# EAGLE board SuperGreatPI_v03 (EAGLE 9.0.1)
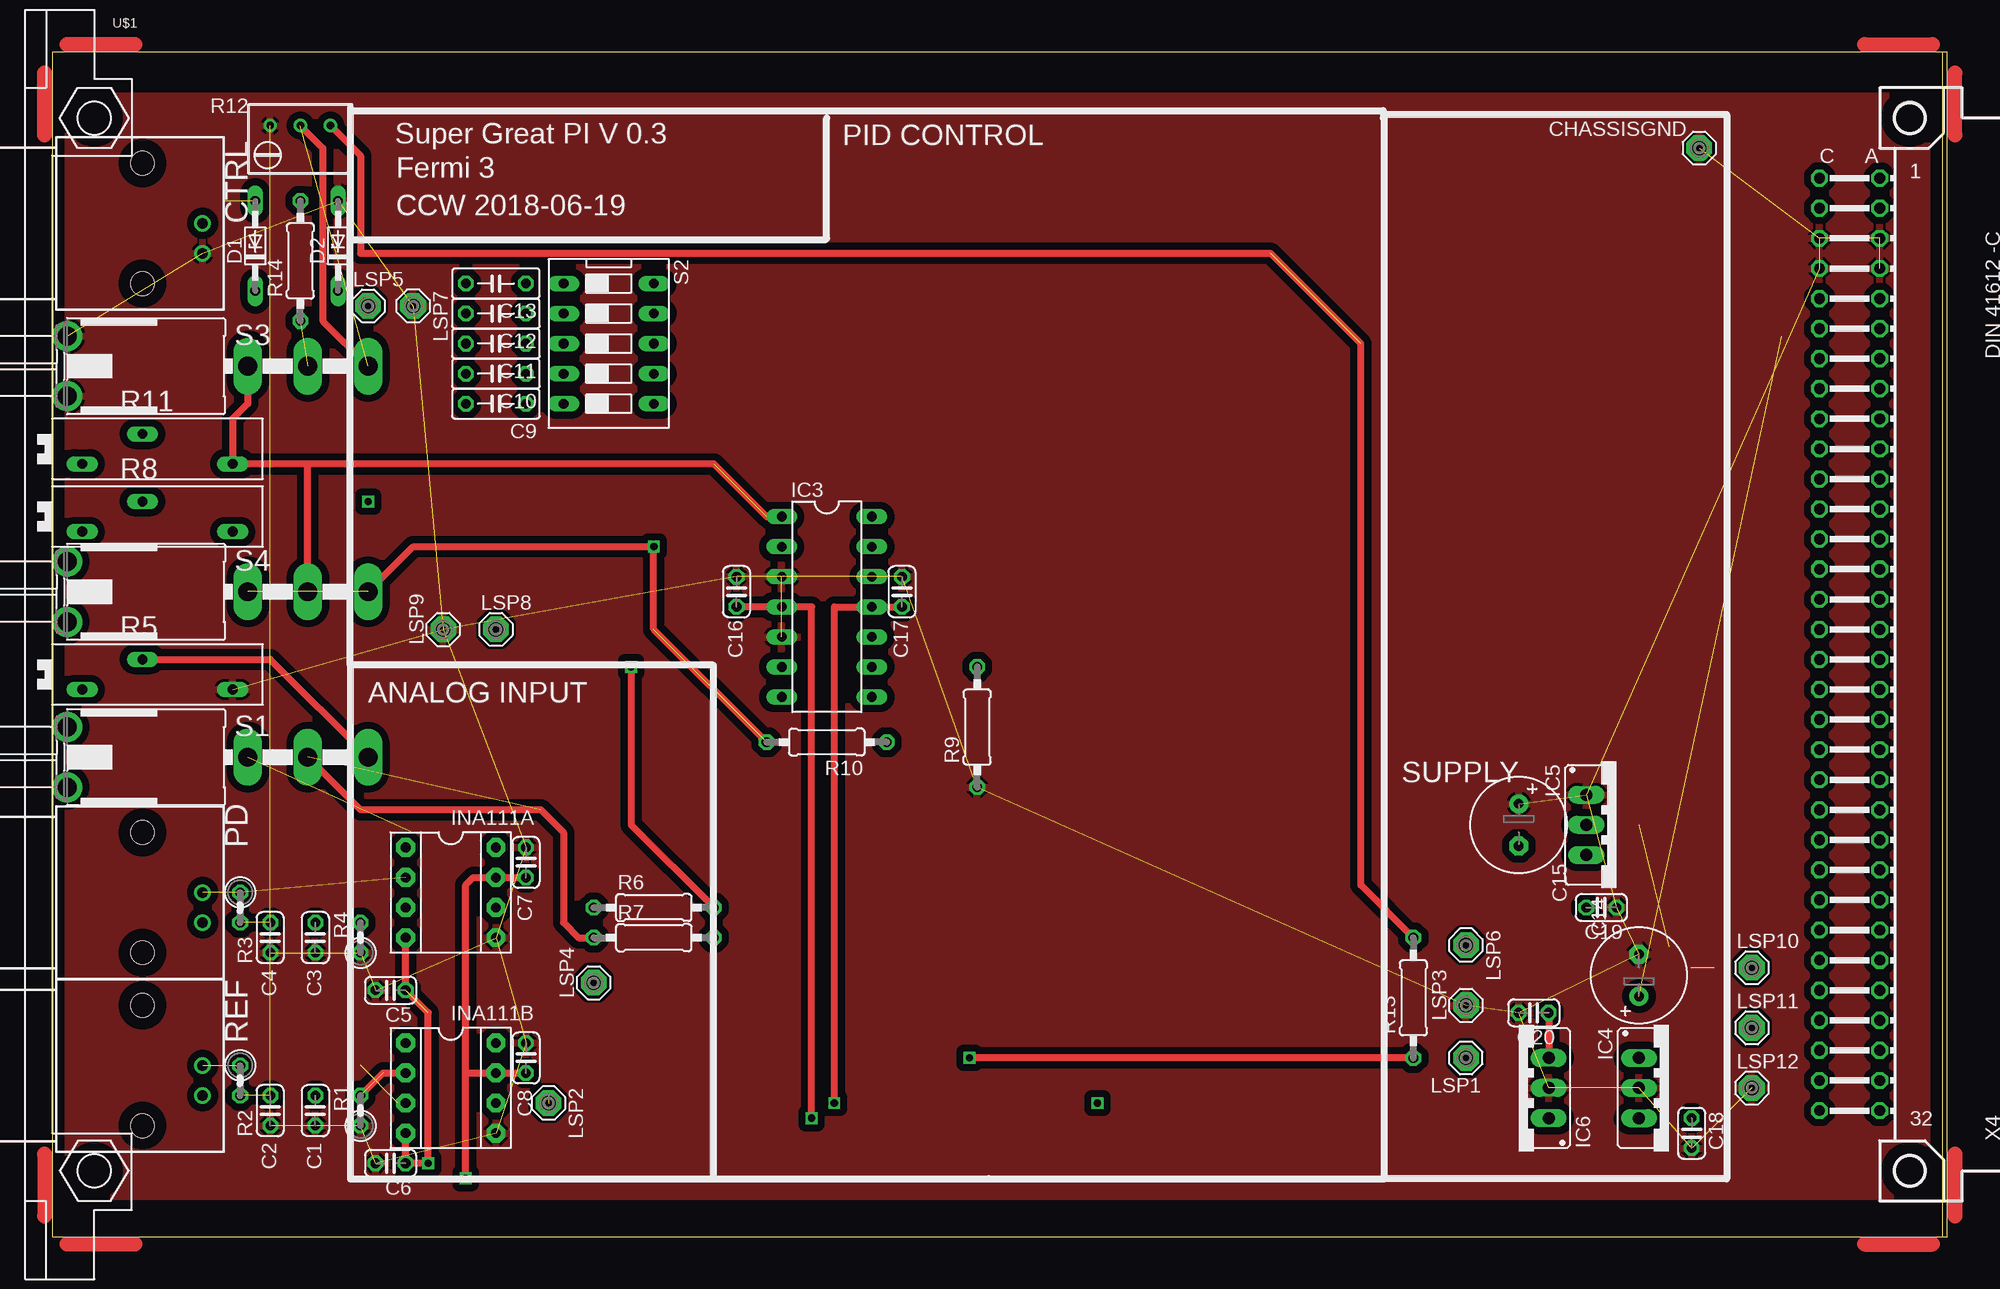
[diagram p0: board, top side]
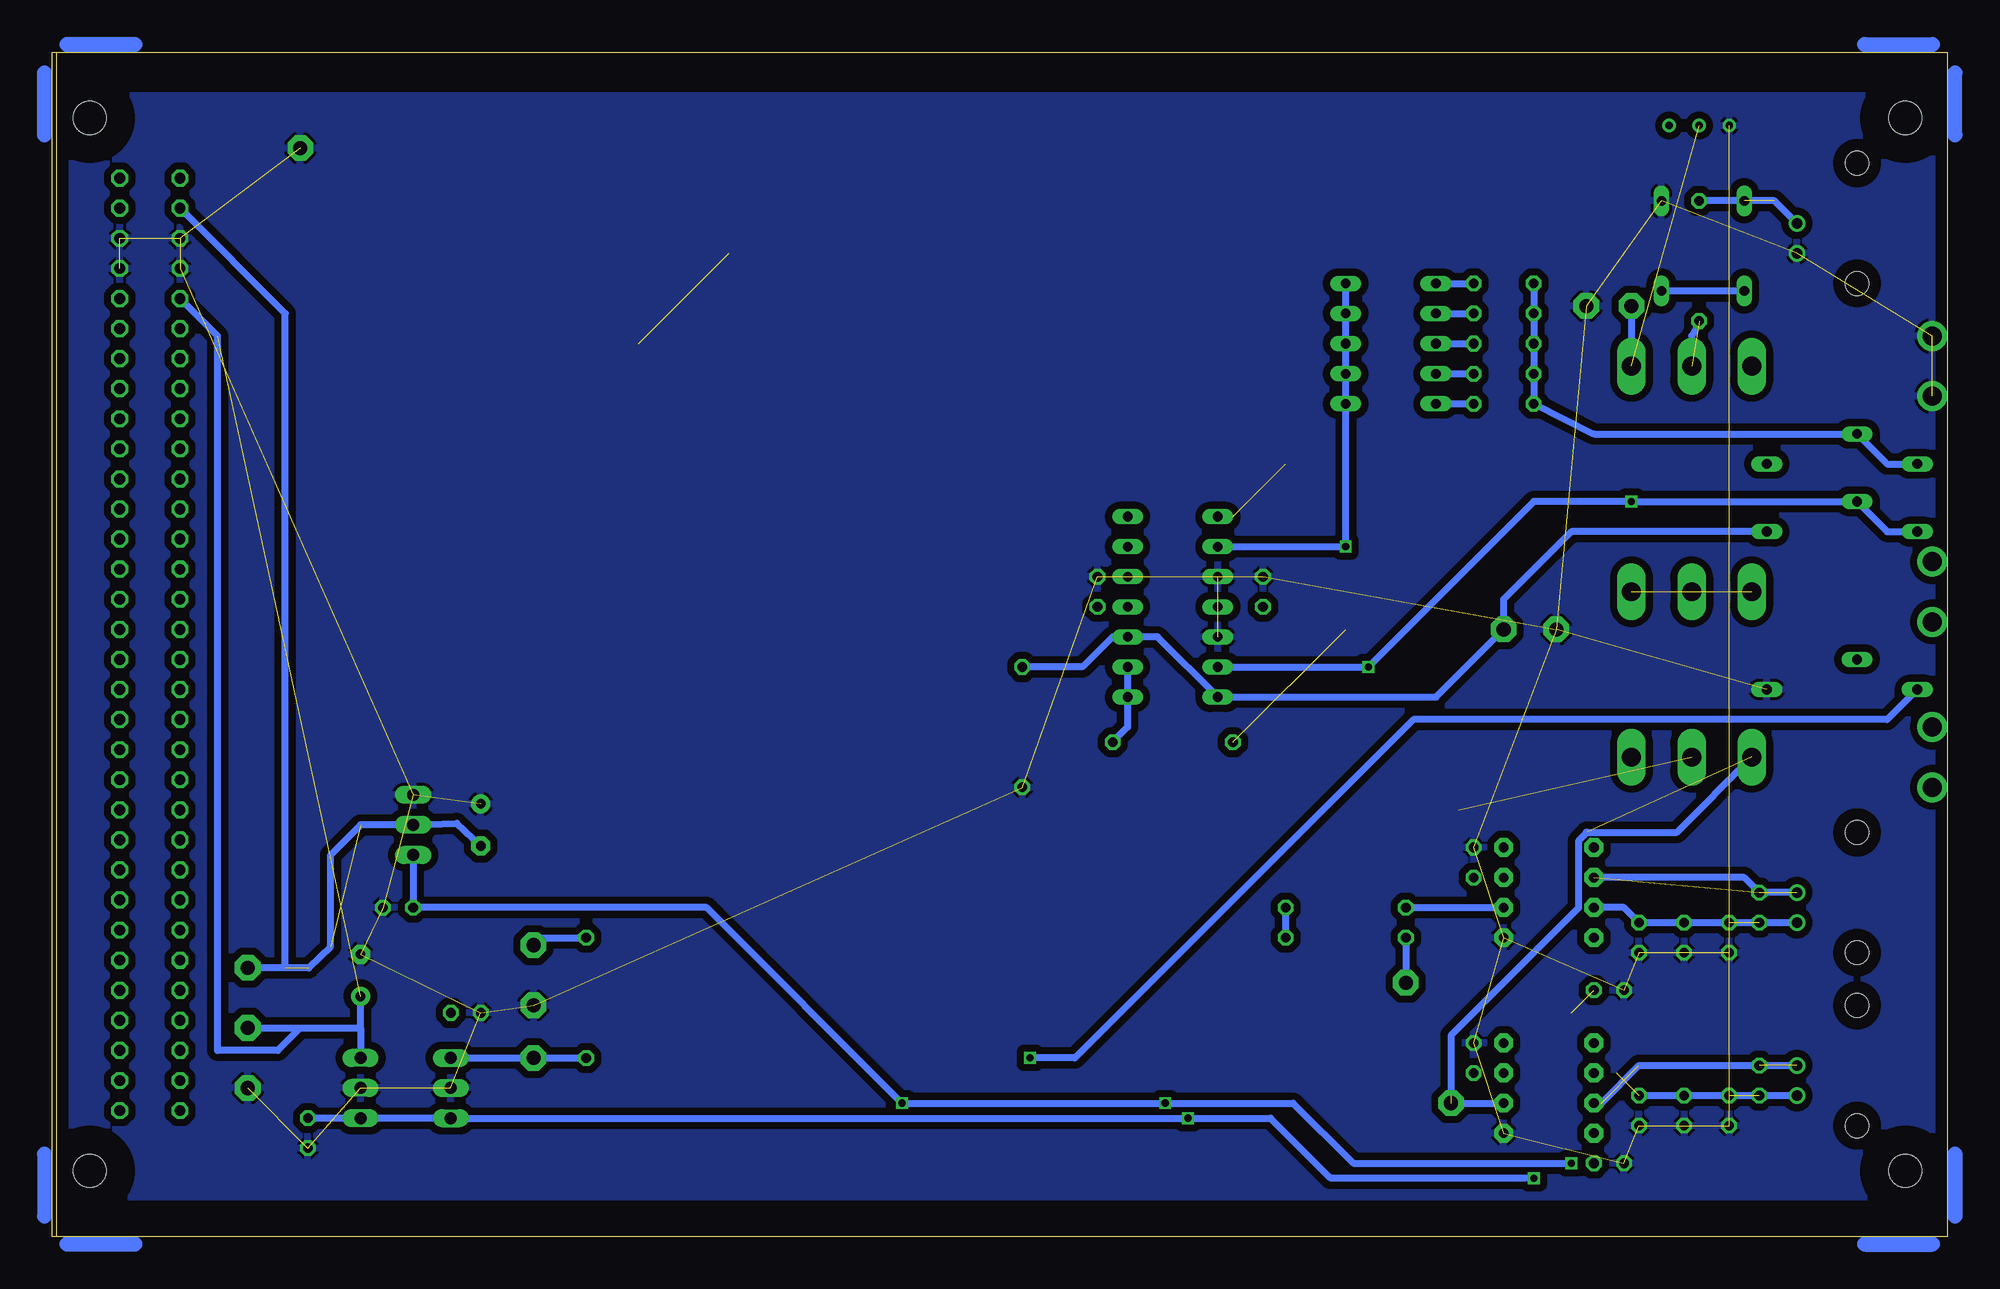
[diagram p1: board, bottom side, seen from below]

Size 160.02 x 100.03 mm. Coordinates in mm from the lower left corner, seen from the top.
Copper layers (1*16): Top 0.035mm / dielectric 1.5mm / Bottom 0.035mm
Design rules "default *": minimum track width 10mil, minimum drill 12mil, track to track 8mil, track to pad 8mil, pad to pad 8mil, via to via 8mil, smd to smd 8mil, copper to edge 40mil, drill to drill 8mil, minimum pad ring 10mil, minimum via ring 8mil, stop-mask expansion 4mil, vias tented up to drill 0mil, thermal gap 10mil

## Footprints (pad centres in the part's own frame; a part is rotated, then mirrored left to right if it is on the bottom)
C025-024X044 = drill 0.813 octagon: 1 -1.27,0; 2 1.27,0
C050-025X075 = drill 0.813 octagon: 1 -2.54,0; 2 2.54,0
E3,5-8 = drill 0.813 pad 1.6: + -1.778,0 | drill 0.813 pad 1.6 octagon: - 1.778,0
MCS08 = drill 1.194 pad 2.159 octagon: MP 0,0
AMP_227161 = drill 0.9 pad 1.27: 1 0,-5.08; 2 -2.54,-5.08 | hole 2: -5.08,0; 5.08,0
DO34Z7 = drill 0.813 long: A 3.81,0; C -3.81,0
DIL14 = drill 0.813 long: 1 -7.62,-3.81; 2 -5.08,-3.81; 3 -2.54,-3.81; 4 0,-3.81; 5 2.54,-3.81; 6 5.08,-3.81; 7 7.62,-3.81; 8 7.62,3.81; 9 5.08,3.81; 10 2.54,3.81; 11 0,3.81; 12 -2.54,3.81; 13 -5.08,3.81; 14 -7.62,3.81
78XXS = drill 1.016 long: GND 0,-2.54; IN -2.54,-2.54; OUT 2.54,-2.54
79XXS = drill 1.016 long: GND -2.54,-2.54; IN 0,-2.54; OUT 2.54,-2.54
DIL08 = drill 0.813 pad 1.6 octagon: 1 -3.81,-3.81; 2 -1.27,-3.81; 3 1.27,-3.81; 4 3.81,-3.81; 5 3.81,3.81; 6 1.27,3.81; 7 -1.27,3.81; 8 -3.81,3.81
0207/2V = drill 0.813 octagon: 1 -1.27,0; 2 1.27,0
PT-SPIN = drill 0.813 long: A -6.35,-1.27; E 6.35,-1.27; S -1.27,1.27
0207/10 = drill 0.813 octagon: 1 -5.08,0; 2 5.08,0
RTRIM3299W = drill 0.61: 1 1.27,-2.54; 2 1.27,0; 3 1.27,2.54
LPV-1 = drill 1.6 long: 1 0,15.24; 2 0,20.32; 3 0,25.4 | drill 1.6 pad 2.54: B -2.54,0; B1 2.54,0
DS-05 = drill 0.813 long: 1 -5.08,-3.81; 2 -2.54,-3.81; 3 0,-3.81; 4 2.54,-3.81; 5 5.08,-3.81; 6 5.08,3.81; 7 2.54,3.81; 8 0,3.81; 9 -2.54,3.81; 10 -5.08,3.81
EK-FP = hole 2.794: 3.556,44.45; 3.556,-44.45
MAC64L = drill 0.914 octagon: A1 -2.54,39.37; A2 -2.54,36.83; A3 -2.54,34.29; A4 -2.54,31.75; A5 -2.54,29.21; A6 -2.54,26.67; A7 -2.54,24.13; A8 -2.54,21.59; A9 -2.54,19.05; A10 -2.54,16.51; A11 -2.54,13.97; A12 -2.54,11.43; A13 -2.54,8.89; A14 -2.54,6.35; A15 -2.54,3.81; A16 -2.54,1.27; A17 -2.54,-1.27; A18 -2.54,-3.81; A19 -2.54,-6.35; A20 -2.54,-8.89; A21 -2.54,-11.43; A22 -2.54,-13.97; A23 -2.54,-16.51; A24 -2.54,-19.05; A25 -2.54,-21.59; A26 -2.54,-24.13; A27 -2.54,-26.67; A28 -2.54,-29.21; A29 -2.54,-31.75; A30 -2.54,-34.29; A31 -2.54,-36.83; A32 -2.54,-39.37; C1 -7.62,39.37; C2 -7.62,36.83; C3 -7.62,34.29; C4 -7.62,31.75; C5 -7.62,29.21; C6 -7.62,26.67; C7 -7.62,24.13; C8 -7.62,21.59; C9 -7.62,19.05; C10 -7.62,16.51; C11 -7.62,13.97; C12 -7.62,11.43; C13 -7.62,8.89; C14 -7.62,6.35; C15 -7.62,3.81; C16 -7.62,1.27; C17 -7.62,-1.27; C18 -7.62,-3.81; C19 -7.62,-6.35; C20 -7.62,-8.89; C21 -7.62,-11.43; C22 -7.62,-13.97; C23 -7.62,-16.51; C24 -7.62,-19.05; C25 -7.62,-21.59; C26 -7.62,-24.13; C27 -7.62,-26.67; C28 -7.62,-29.21; C29 -7.62,-31.75; C30 -7.62,-34.29; C31 -7.62,-36.83; C32 -7.62,-39.37 | hole 2.794: 0,44.45; 0,-44.45

## Placement (x,y rotation side)
C1  220n  [C025-024X044]  22.23,10.64 90 top
C2  220n  [C025-024X044]  18.42,10.64 90 top
C3  220n  [C025-024X044]  22.23,25.25 90 top
C4  220n  [C025-024X044]  18.42,25.25 90 top
C5  100n  [C025-024X044]  28.58,20.8 180 top
C6  100n  [C025-024X044]  28.58,6.2 180 top
C7  100n  [C025-024X044]  40.01,31.6 90 top
C8  100n  [C025-024X044]  40.01,15.09 90 top
C9  [C050-025X075]  37.47,70.33 180 top
C10  [C050-025X075]  37.47,72.87 180 top
C11  [C050-025X075]  37.47,75.41 180 top
C12  [C050-025X075]  37.47,77.95 180 top
C13  [C050-025X075]  37.47,80.49 180 top
C14  220µ  [E3,5-8]  133.99,22.07 90 top
C15  220µ  [E3,5-8]  123.83,34.77 270 top
C16  100n  [C025-024X044]  57.79,54.46 90 top
C17  100n  [C025-024X044]  71.76,54.46 90 top
C18  100n  [C025-024X044]  138.43,8.74 270 top
C19  100n  [C025-024X044]  130.81,27.79 180 top
C20  100n  [C025-024X044]  125.1,18.9 180 top
CHASSISGND  MCS08  [MCS08]  139.06,91.92 0 top
CTRL  [AMP_227161]  7.62,85.57 90 top
D1  C5V6  [DO34Z7]  17.15,83.67 90 top
D2  C5V6  [DO34Z7]  24.13,83.67 90 top
IC3  OP470P  [DIL14]  65.41,53.19 270 top
IC4  MC7815  [78XXS]  136.53,12.55 270 top
IC5  MC7915  [79XXS]  132.08,34.77 270 top
IC6  MC7805  [78XXS]  123.83,12.55 90 top
INA111A  INA111P  [DIL08]  33.66,29.06 270 top
INA111B  INA111P  [DIL08]  33.66,12.55 270 top
LSP1  MCS08  [MCS08]  119.38,15.09 180 top
LSP2  MCS08  [MCS08]  41.91,11.28 270 top
LSP3  MCS08  [MCS08]  119.38,19.53 90 top
LSP4  MCS08  [MCS08]  45.72,21.44 90 top
LSP5  MCS08  [MCS08]  26.67,78.59 0 top
LSP6  MCS08  [MCS08]  119.38,24.61 270 top
LSP7  MCS08  [MCS08]  30.48,78.59 270 top
LSP8  MCS08  [MCS08]  37.47,51.28 0 top
LSP9  MCS08  [MCS08]  33.02,51.28 90 top
LSP10  -18V  [MCS08]  143.51,22.71 0 top
LSP11  -18V  [MCS08]  143.51,17.63 0 top
LSP12  GND  [MCS08]  143.51,12.55 0 top
PD  [AMP_227161]  7.62,29.06 90 top
R1  100k  [0207/2V]  26.03,10.64 90 top
R2  100k  [0207/2V]  15.88,13.18 270 top
R3  100k  [0207/2V]  15.88,27.79 270 top
R4  100k  [0207/2V]  26.03,25.25 90 top
R5  20k  [PT-SPIN]  8.89,47.47 0 top
R6  10k  [0207/10]  50.8,27.79 0 top
R7  10k  [0207/10]  50.8,25.25 0 top
R8  20k  [PT-SPIN]  8.89,60.81 0 top
R9  10k  [0207/10]  78.11,43.03 90 top
R10  1k  [0207/10]  65.41,41.76 180 top
R11  20k  [PT-SPIN]  8.89,66.52 0 top
R12  [RTRIM3299W]  20.96,92.56 90 top
R13  10k  [0207/10]  114.94,20.17 90 top
R14  10k  [0207/10]  20.96,82.4 90 top
REF  [AMP_227161]  7.62,14.45 90 top
S1  [LPV-1]  1.27,40.49 270 top
S2  [DS-05]  46.99,75.41 270 top
S3  [LPV-1]  1.27,73.51 270 top
S4  [LPV-1]  1.27,54.46 270 top
U$1  [EK-FP]  0,50.01 0 top
X4  MAC64L  [MAC64L]  156.84,50.01 0 top

## Library data of the parts
C1-C20 R1-R4 R6 R7 R9 R10 R13 R14 = rcl
CHASSISGND LSP1-LSP12 = solpad
CTRL PD REF = con-coax
D1 D2 = diode
IC3 = linear
IC4-IC6 = v-reg
INA111A INA111B = burr-brown
R5 R8 R11 = pot
R12 = resistor
S1 S3 S4 = switch
S2 = switch-dil
U$1 = 19inch
X4 = con-vg

## Nets
+5V: C20.1 IC6.OUT LSP1.MP R5.A R13.1
+15V: C7.1 C8.1 C16.1 C18.1 IC3.4 IC4.OUT IC6.IN INA111A.7 INA111B.7
-15V: C5.1 C6.1 C17.1 C19.2 IC3.11 IC5.OUT INA111A.4 INA111B.4
GND: C1.1 C2.1 C3.1 C4.1 C5.2 C6.2 C7.2 C8.2 C14.- C15.+ C16.2 C17.2 C18.2 C19.1 C20.2 CHASSISGND.MP CTRL.2 D2.A IC3.3 IC3.5 IC4.GND IC5.GND IC6.GND INA111A.5 INA111B.5 LSP3.MP LSP7.MP LSP9.MP LSP12.MP R1.1 R4.1 R5.E R9.1 R12.3 S3.B S3.B1 X4.A3 X4.A4 X4.C3 X4.C4
N$13: IC3.8 IC3.9 R10.1
N$16: INA111A.6 R6.1
N$17: INA111B.3 R2.1 REF.1
N$18: INA111A.2 PD.1 R3.1
N$22: C1.2 C2.2 INA111B.2 R1.2 R2.2 REF.2
N$23: C3.2 C4.2 INA111A.3 PD.2 R3.2 R4.2
N$28: C14.+ IC4.IN LSP11.MP X4.C5
N$29: IC3.7 IC3.10 LSP8.MP R8.E R9.2
N$33: CTRL.1 D1.A R14.2
N$36: IC3.2 R10.2 S2.6 S2.7 S2.8 S2.9 S2.10 S4.1 S4.3
N$38: C15.- IC5.IN LSP10.MP X4.C2
N$42: C9.2 C10.2 C11.2 C12.2 C13.2 R11.A R11.S
N$44: LSP4.MP R7.1 S1.2
N$45: IC3.1 R11.E S3.1 S4.2
N$46: IC3.6 R6.2 R7.2 R8.A R8.S
N$49: R5.S S1.3
N$50: C9.1 S2.5
N$54: C10.1 S2.4
N$55: C11.1 S2.3
N$56: C12.1 S2.2
N$57: C13.1 S2.1
N$58: INA111B.6 LSP2.MP S1.1
N$59: LSP6.MP R12.1 R13.2
N$60: R14.1 S3.2
N$61: LSP5.MP R12.2 S3.3
N$62: D1.C D2.C

## Tracks (layer width: path | path; a pad name or v marks a point on that pad's centre or on a via)
+5V  (via drill 0.6)
  Top 0.61: C20.1 IC6.OUT | R13.1 v77.47,15.09
  Bottom 0.61: IC6.OUT LSP1.MP R13.1 | R5.A 5.08,43.66 45.09,43.66 73.66,15.09 v77.47,15.09
+15V  (via drill 0.6)
  Top 0.61: C8.1 INA111B.7 34.93,13.82 | C7.1 INA111A.7 35.56,30.33 34.93,29.69 34.93,13.82 | v34.93,4.93 34.93,13.82 | C16.1 IC3.4 64.14,53.19 v64.14,10.01
  Bottom 0.61: C18.1 IC4.OUT IC6.IN v64.14,10.01 57.15,10.01 52.07,4.93 v34.93,4.93
-15V  (via drill 0.6)  (1 unrouted)
  Top 0.61: v66.04,11.28 66.04,53.19 IC3.11 C17.1 | INA111A.4 C5.1 31.75,18.9 v31.75,6.2 C6.1 INA111B.4
  Bottom 0.61: IC5.OUT C19.2 104.78,27.79 v88.27,11.28 v66.04,11.28 55.25,11.28 50.17,6.2 v31.75,6.2
GND  (39 unrouted)
  pour Bottom (isolate 0.61): 0.02,96.35 160.02,96.35 160.02,3.35 0.02,3.35
  pour Top (isolate 0.61): 0.02,96.35 160.02,96.35 160.02,3.35 0.02,3.35
N$1
  Top 0.61: 139.7,91.92 138.43,91.92
N$13
  Bottom 0.61: IC3.9 IC3.8 69.22,43.03 R10.1
N$16
  Bottom 0.61: R6.1 INA111A.6
N$17  (2 unrouted)
  Bottom 0.61: REF.1 26.03,14.45 29.21,11.28 INA111B.3
N$18  (2 unrouted)
  Bottom 0.61: PD.1 R3.1 17.15,30.33 INA111A.2
N$22  (2 unrouted)
  Top 0.61: INA111B.2 27.94,13.82 R1.2
  Bottom 0.61: REF.2 C2.2 C1.2 R1.2
N$23  (1 unrouted)
  Bottom 0.61: PD.2 C4.2 C3.2 R4.2 27.31,27.79 INA111A.3
N$28  (1 unrouted)
  Bottom 0.61: 133.99,17.63 C14.+ | 133.99,17.63 IC4.IN | LSP11.MP 139.06,17.63 | 139.06,17.63 133.99,17.63 | X4.C5 146.05,76.05 146.05,15.72 140.97,15.72 139.06,17.63
N$29
  Bottom 0.61: R8.E 31.75,59.54 37.47,53.82 LSP8.MP 43.18,45.57 IC3.7 66.68,50.65 IC3.10 70.49,50.65 73.03,48.11 R9.2
N$33  (1 unrouted)
  Bottom 0.61: CTRL.1 14.61,87.48 R14.2
N$36  (via drill 0.6)  (2 unrouted)
  Top 0.61: S4.3 30.48,58.27 v50.8,58.27 50.8,51.28 R10.2
  Bottom 0.61: S2.10 S2.9 S2.8 S2.7 S2.6 v50.8,58.27 IC3.2
N$38  (2 unrouted)
  Bottom 0.61: C15.- 125.86,34.9 IC5.IN 133.99,34.77 136.53,32.23 136.53,24.61 | 136.52,24.49 138.36,22.67 LSP10.MP | X4.C2 140.34,77.95 140.34,22.71
N$42
  Bottom 0.61: C13.2 C12.2 C11.2 C10.2 C9.2 29.84,67.79 R11.S 5.08,65.25 R11.A
N$44  (1 unrouted)
  Top 0.61: R7.1 44.45,25.25 43.18,26.52 43.18,34.14 41.28,36.04 26.03,36.04 S1.2
  Bottom 0.61: R7.1 LSP4.MP
N$45  (1 unrouted)
  Top 0.61: 21.59,65.25 55.88,65.25 60.33,60.81 IC3.1 | 21.59,65.25 R11.E 15.24,69.06 16.51,70.33 S3.1 | S4.2 21.59,65.25
N$46  (via drill 0.6)
  Top 0.61: v48.9,48.11 48.9,34.77 R6.2
  Bottom 0.61: R8.A 5.08,59.54 R8.S v26.67,62.08 34.93,62.08 v48.9,48.11 IC3.6 | R6.2 R7.2
N$49
  Top 0.61: R5.S 18.42,48.74 S1.3
N$50
  Bottom 0.61: S2.5 C9.1
N$54
  Bottom 0.61: S2.4 C10.1
N$55
  Bottom 0.61: S2.3 C11.1
N$56
  Bottom 0.61: S2.2 C12.1
N$57
  Bottom 0.61: S2.1 C13.1
N$58  (2 unrouted)
  Bottom 0.61: LSP2.MP INA111B.6 | 41.91,11.91 41.91,16.99 31.15,27.75 31.15,33.41 30.39,34.18 | 30.48,34.14 22.86,34.14 S1.1
N$59  (1 unrouted)
  Top 0.61: R12.1 26.03,91.29 26.03,83.03 102.87,83.03 110.49,75.41 110.49,29.69 R13.2
  Bottom 0.61: R13.2 118.75,25.25 LSP6.MP
N$60  (1 unrouted)
  Bottom 0.61: R14.1 21.59,76.05 S3.2
N$61  (1 unrouted)
  Top 0.61: R12.2 22.86,91.92 22.86,77.32 S3.3
  Bottom 0.61: LSP5.MP S3.3
N$62
  Bottom 0.61: D1.C D2.C

## Text on the board
tPlace: Super Great PI V 0.3 | PID CONTROL | Fermi 3 | CCW 2018-06-19 | ANALOG INPUT | SUPPLY